# Altium PCB HGCD.PcbDoc
Units mm, origin at the board's own origin, x right, y up, seen from the top; angles counter-clockwise.
Board outline 57.28 x 50.29 mm, 4 copper layers (Top layer, Ground Plane, Power Plane, Bottom layer), stack 0.844 mm thick; 85 components, 62 nets, 353 pads, 88 vias.
Unrouted connection lines stored in the file: 18.
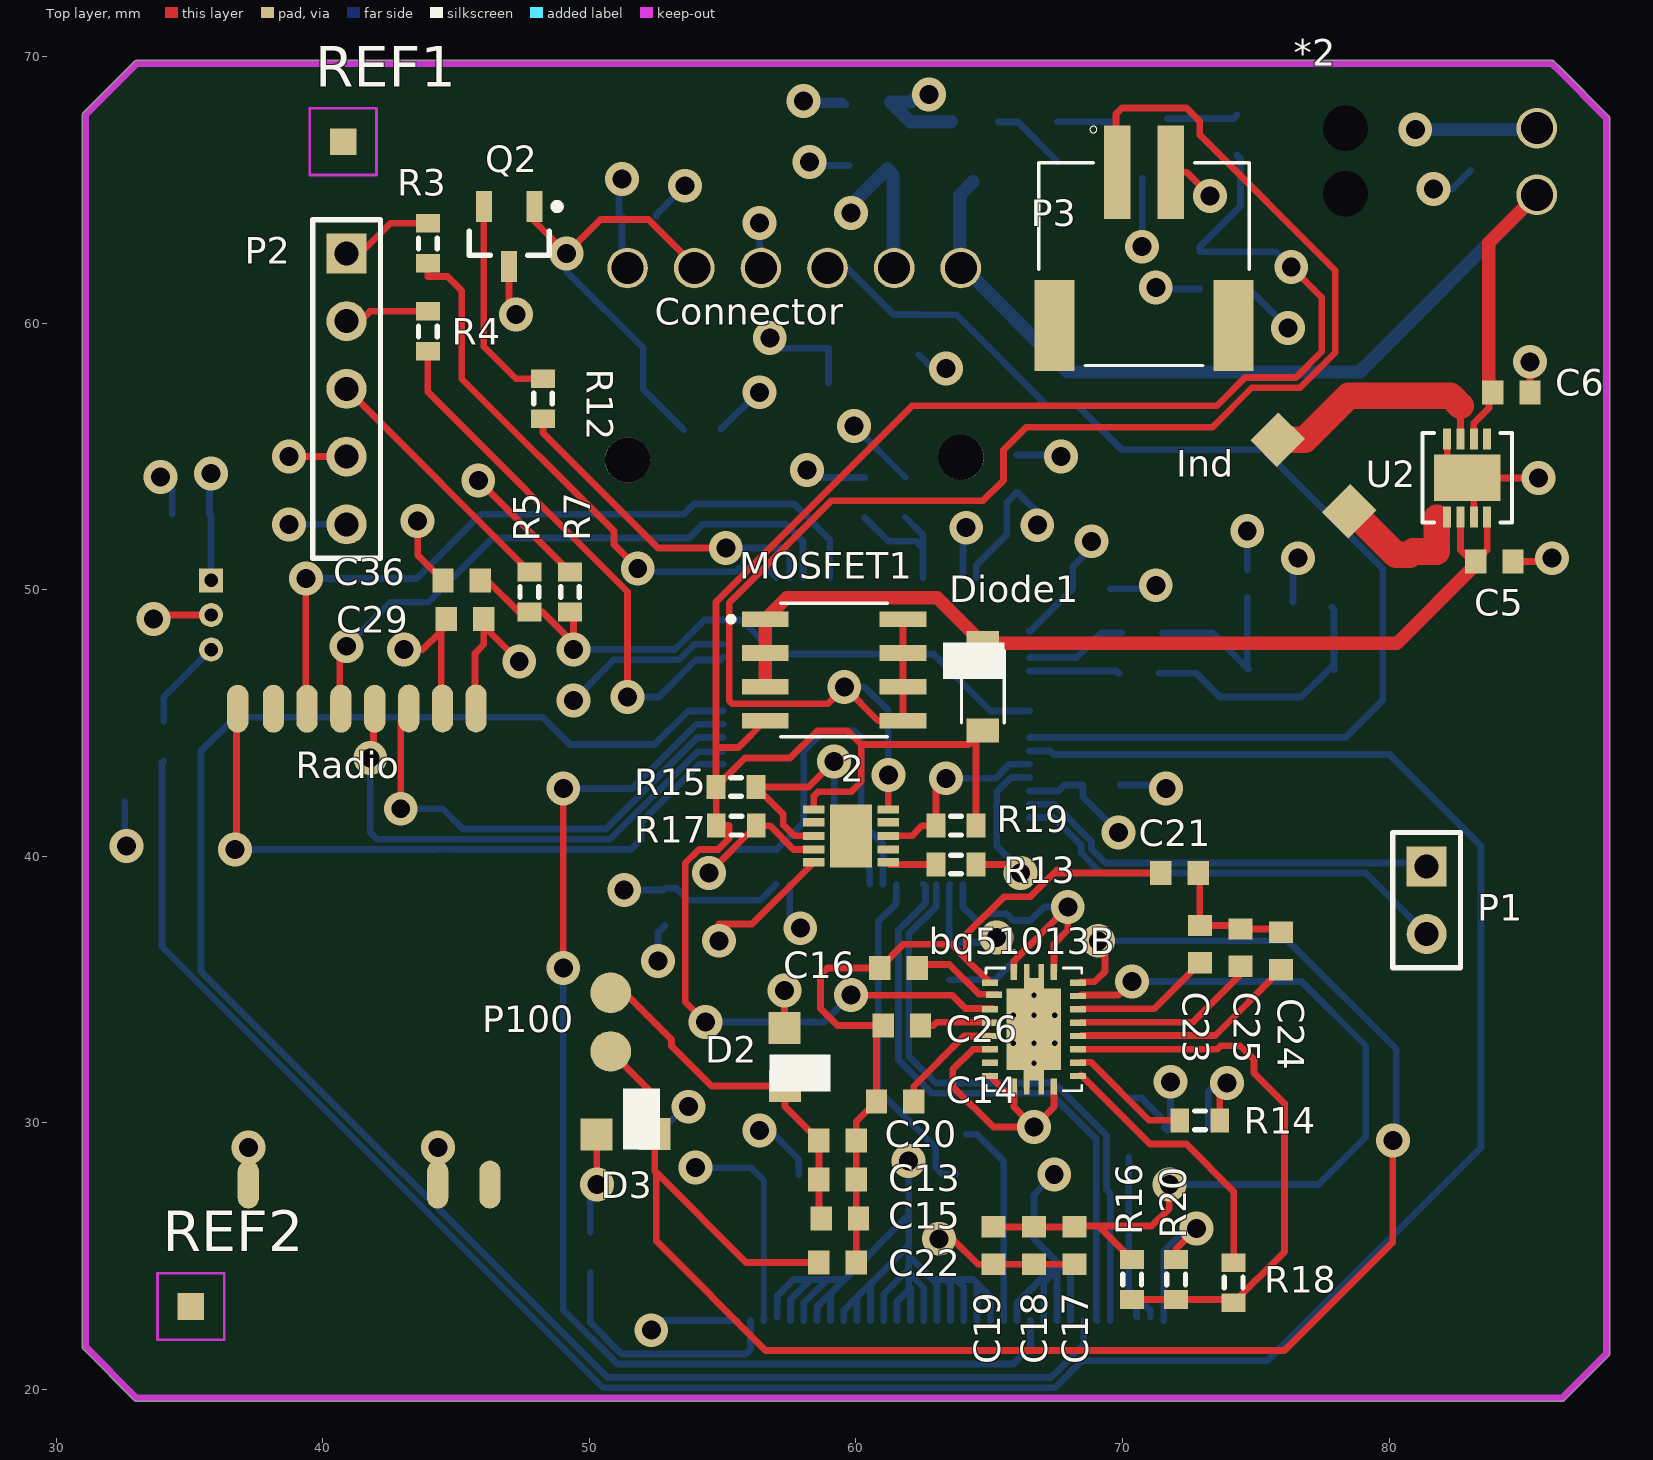
[diagram p0: Top layer view]
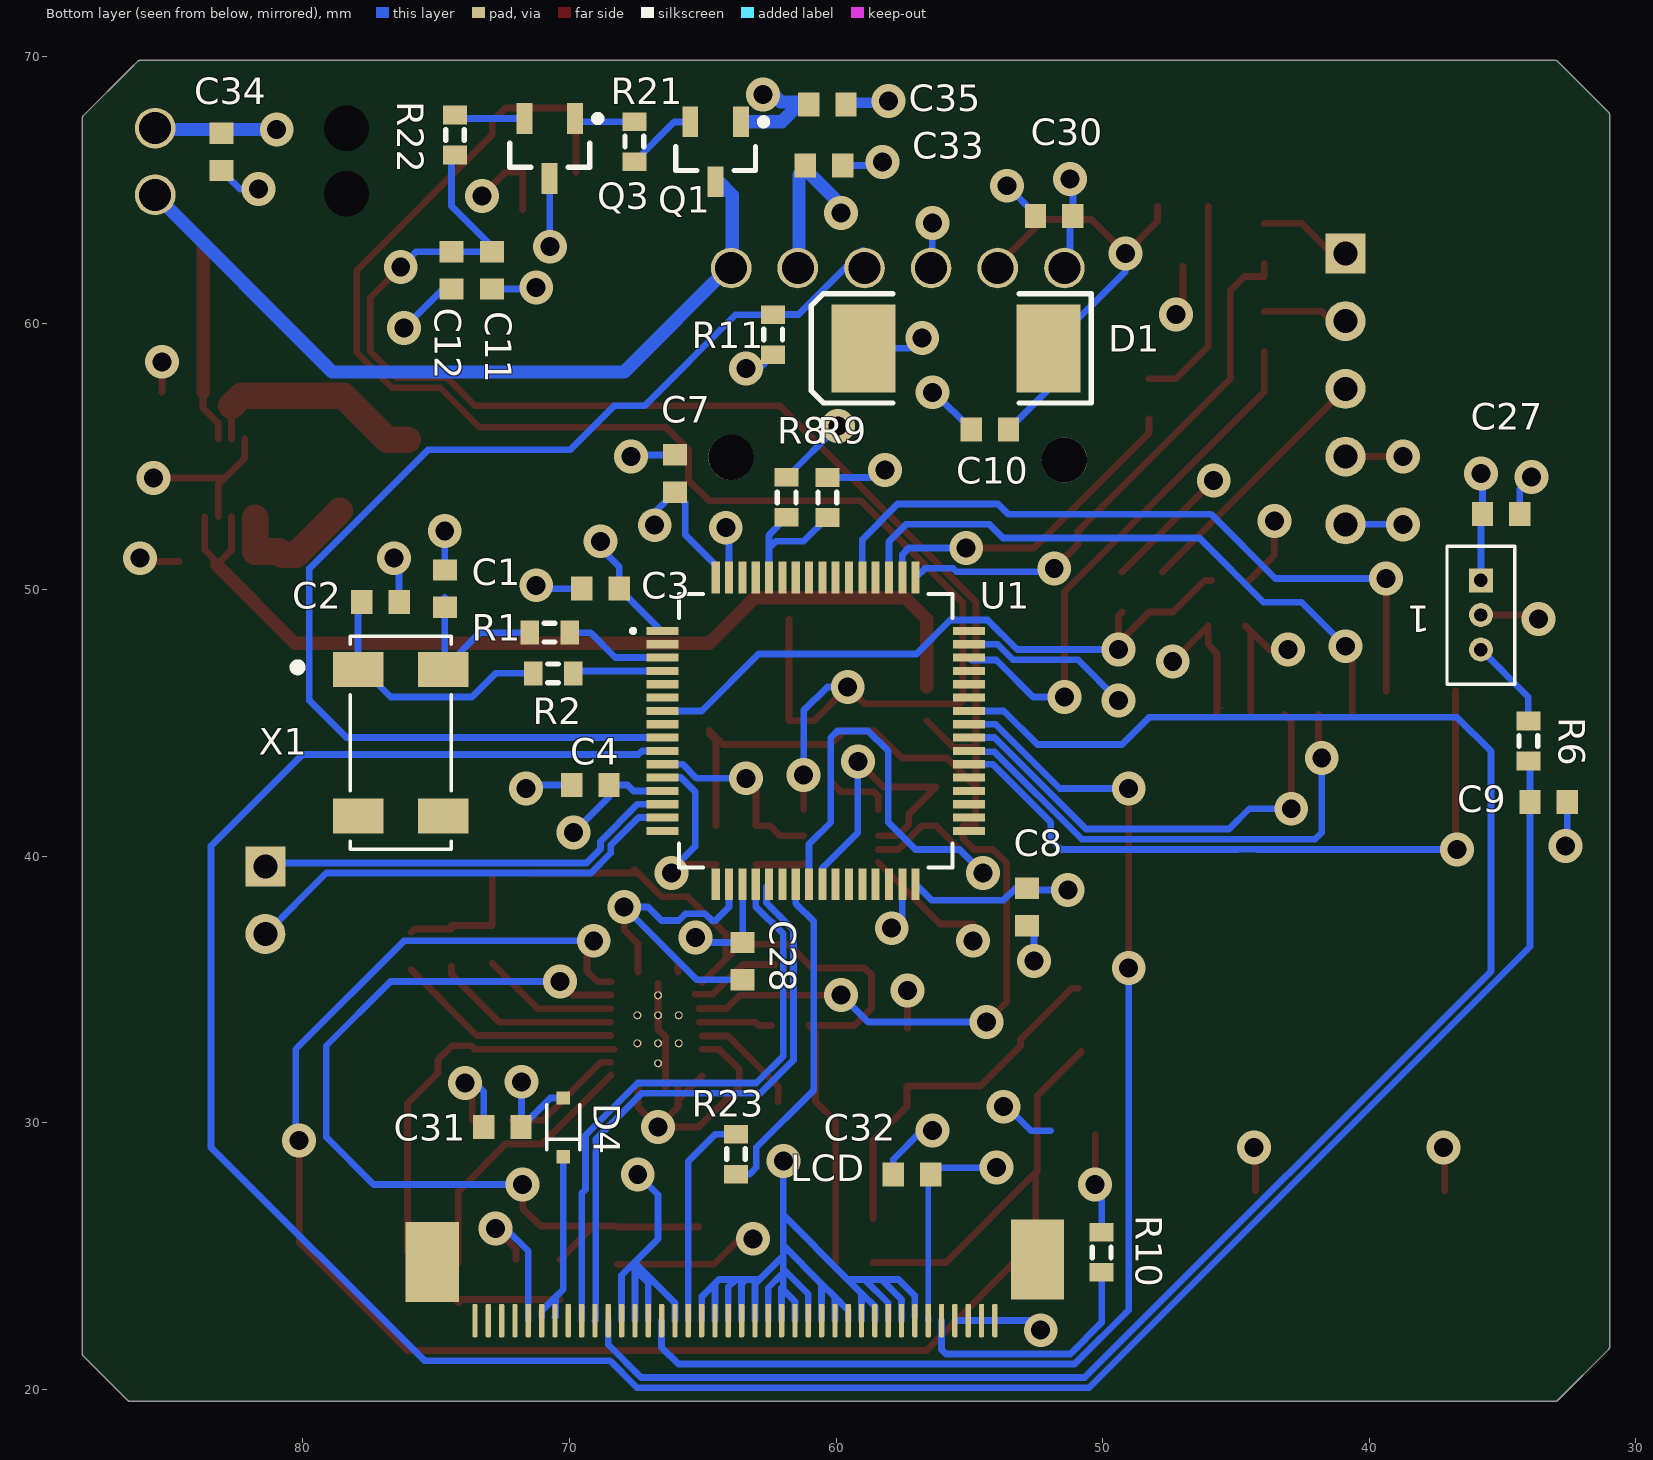
[diagram p1: Bottom layer view, seen from below]
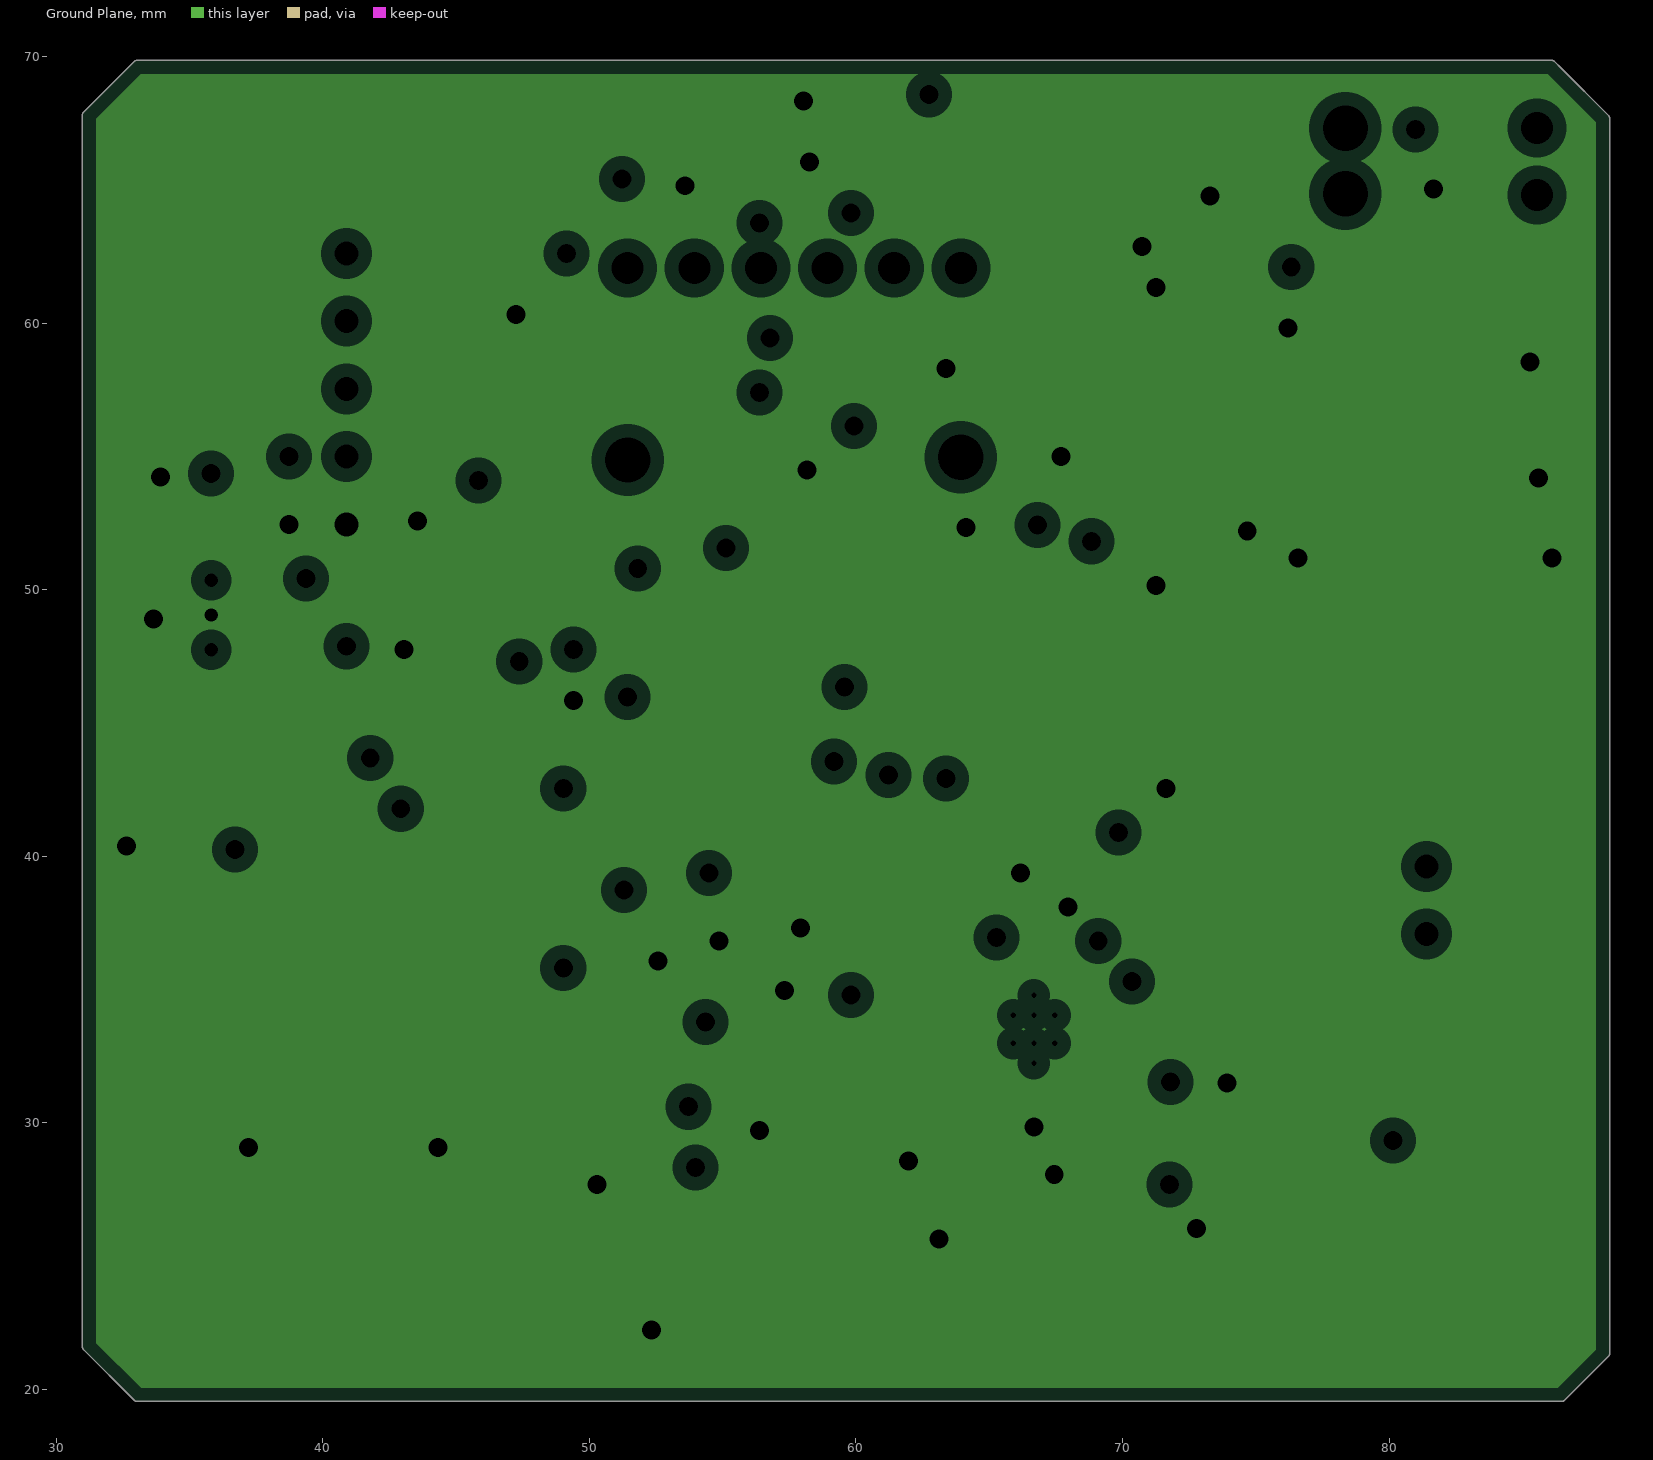
[diagram p2: Ground Plane, clearances drawn from the general rule]
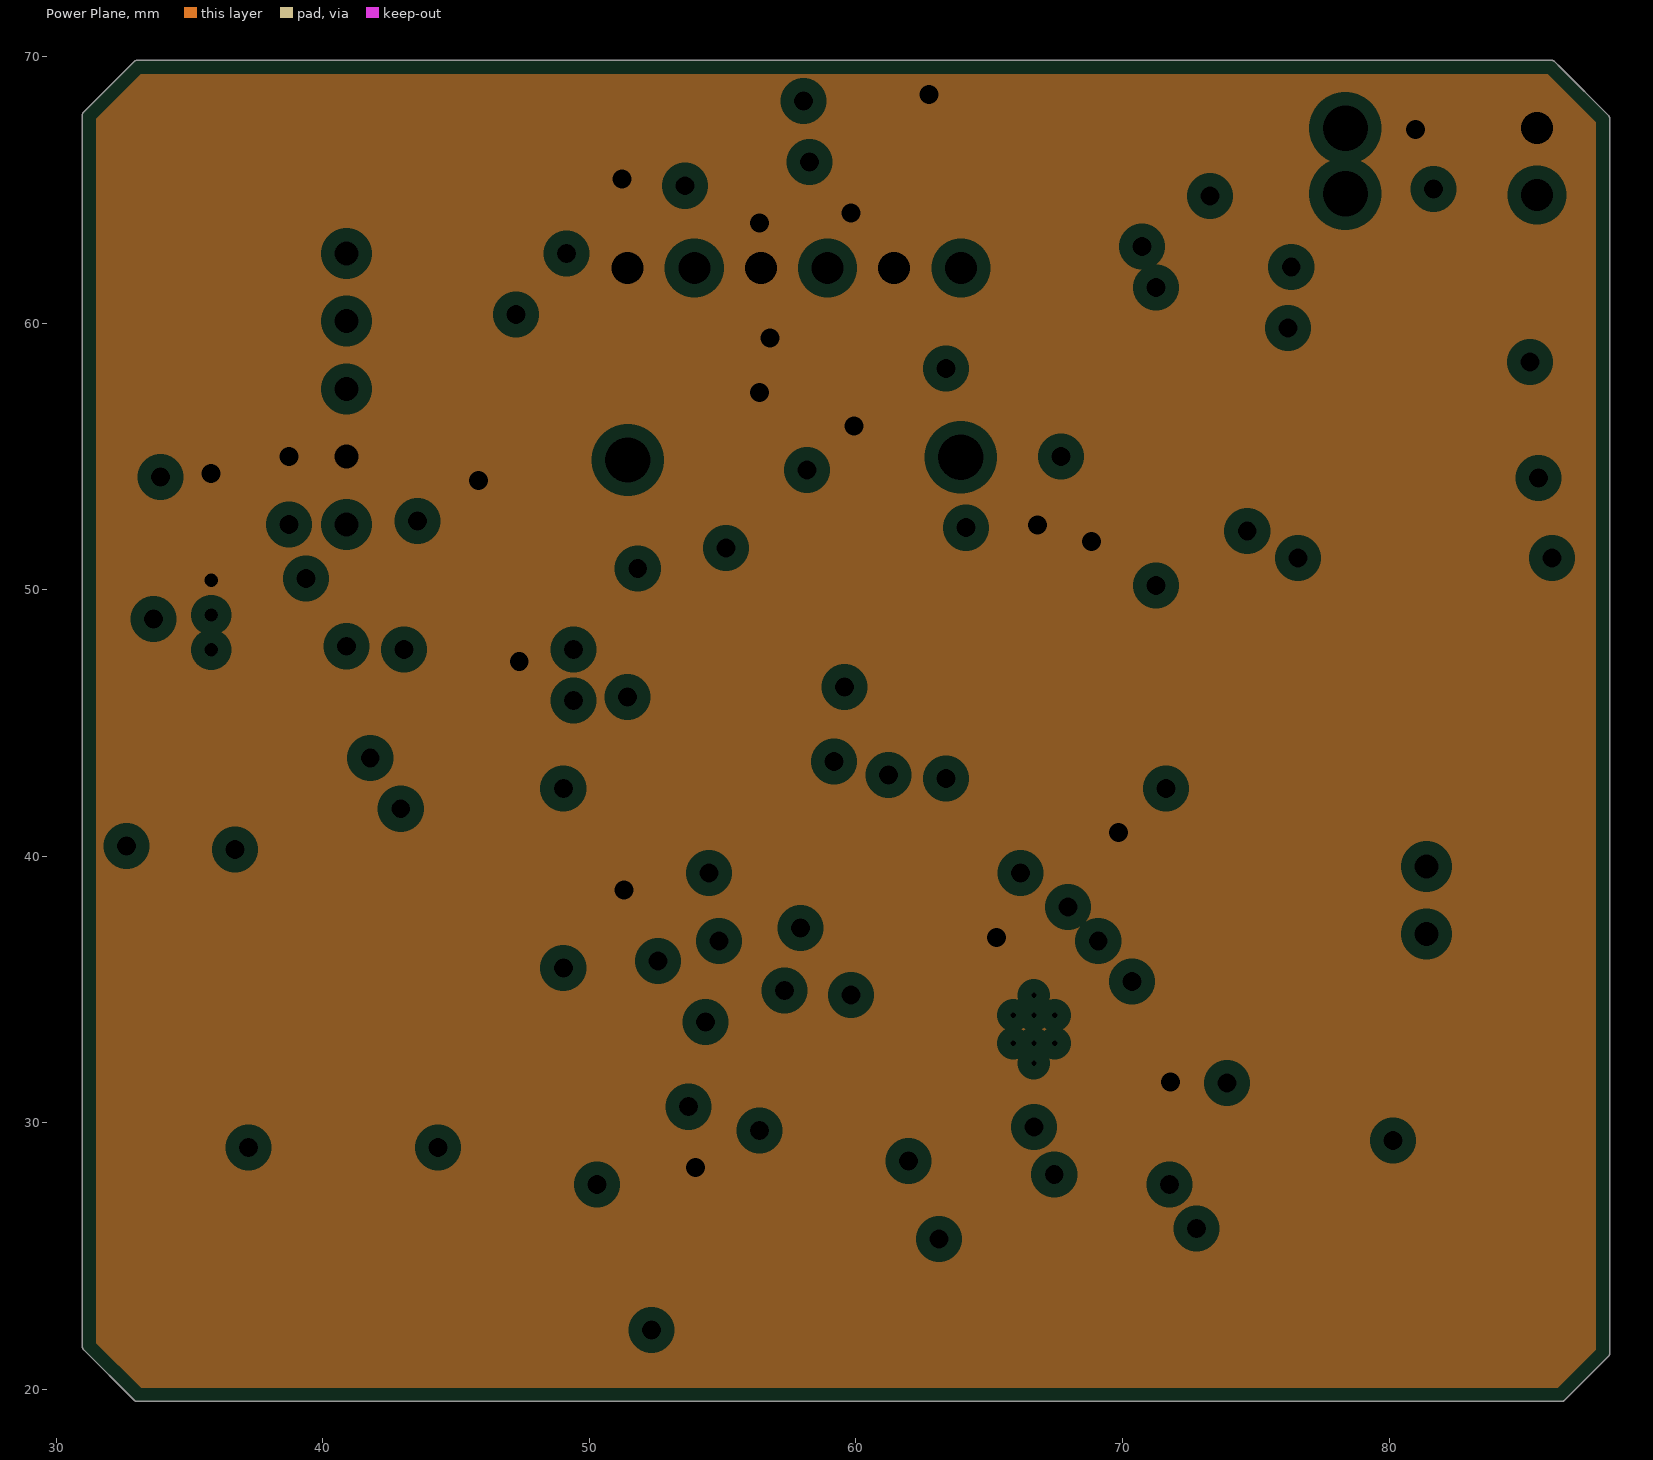
[diagram p3: Power Plane, clearances drawn from the general rule]

## Layer stack, top to bottom
Top Solder: solder mask 0.0102, Solder Resist, Dk 3.5
Top layer: signal copper 0.0356
Dielectric 1: core 0.32, FR-4, Dk 4.8
Ground Plane: plane copper 0.036, net GND
Dielectric 3: prepreg 0.127, Dk 4.2
Power Plane: plane copper 0.036, net VCC
Dielectric 4: core 0.254, Dk 4.2
Bottom layer: signal copper 0.0356
Bottom Solder: solder mask 0.0102, Solder Resist, Dk 3.5

## Board outline
31.025,21.499 cw(c31.115,21.59) 30.988,21.59 30.988,67.818 cw(c31.115,67.818) 31.025,67.909 31.025,67.908 32.93,69.813 32.929,69.813 cw(c33.02,69.723) 33.02,69.85 86.106,69.85 cw(c86.106,69.723) 86.197,69.813 86.196,69.813 86.451,69.559 ccw(c86.36,69.469) 86.45,69.559 ccw(c86.36,69.469) 86.45,69.56 86.451,69.559 88.228,67.781 88.228,67.782 cw(c88.138,67.691) 88.265,67.691 88.265,21.336 cw(c88.138,21.336) 88.228,21.245 88.228,21.246 86.577,19.595 86.578,19.595 cw(c86.487,19.685) 86.487,19.558 33.02,19.558 cw(c33.02,19.685) 32.929,19.595 32.93,19.595

## Design rules (kind name [scope] priority, off if disabled: settings)
Clearance [All] p1: gap=0.127 ignorepadtopadclearanceinfootprint=FALSE
PlaneClearance [All] p1: clearance=0.508
PlaneConnect [All] p1: planeconnectstyle=Relief reliefexpansion=0.508 reliefentries=4 reliefconductorwidth=0.254 reliefairgap=0.254
PolygonConnect [All] p1: connectstyle=Relief reliefconductorwidth=0.254 reliefentries=4 polygonreliefangle="90 Angle" airgapwidth=0.254
RoomDefinition ZigBee [InComponentClass('ZigBee')] p1: confinementstyle=ConfineIn formatcopy=TRUE lockcomponents=FALSE outline -25.4,-25.4 25.4,-25.4 25.4,0 -25.4,0
RoomDefinition WCcircuit [InComponentClass('WCcircuit')] p2: confinementstyle=ConfineIn formatcopy=TRUE lockcomponents=FALSE outline -25.4,-25.4 25.4,-25.4 25.4,0 -25.4,0
RoomDefinition TPS6120x [InComponentClass('TPS6120x')] p3: confinementstyle=ConfineIn formatcopy=TRUE lockcomponents=FALSE outline -25.4,-25.4 25.4,-25.4 25.4,0 -25.4,0
RoomDefinition "TFT LCD ER-TFT018-2" [InComponentClass('TFT LCD ER-TFT018-2')] p4: confinementstyle=ConfineIn formatcopy=TRUE lockcomponents=FALSE outline -25.4,-25.4 25.4,-25.4 25.4,0 -25.4,0
RoomDefinition STM32 [InComponentClass('STM32')] p5: confinementstyle=ConfineIn formatcopy=TRUE lockcomponents=FALSE outline -25.4,-25.4 25.4,-25.4 25.4,0 -25.4,0
RoomDefinition Magnetometer [InComponentClass('Magnetometer')] p6: confinementstyle=ConfineIn formatcopy=TRUE lockcomponents=FALSE outline -25.4,-25.4 25.4,-25.4 25.4,0 -25.4,0
RoomDefinition connectors [InComponentClass('connectors')] p7: confinementstyle=ConfineIn formatcopy=TRUE lockcomponents=FALSE outline -25.4,-25.4 25.4,-25.4 25.4,0 -25.4,0
RoutingVias [All] p1: holewidth=0.711 width=1.27 viastyle="Through Hole" minholewidth=0.711 minwidth=1.27 maxholewidth=0.711 maxwidth=1.27
SolderMaskExpansion [All] p1: expansion=0.102
Width [All] p1: maxlimit=1 minlimit=0.025 preferedwidth=0.254
28 further rules are at their usual default settings.

## Classes and differential pairs
component class ZigBee: C29 Radio
component class WCcircuit: 2 bq51013B C11 C12 C13 C14 C15 C16 C17 C18 C19 C20 C21 C22 C23 C24 C25 C26 D2 D3 Diode1 MOSFET1 P3 P100 R13 R14 R15 R16 R17 R18 R19 R20
component class TPS6120x: C5 C6 C33 C34 C35 Ind Q1 Q3 R21 R22 U2
component class "TFT LCD ER-TFT018-2": C31 C32 D4 LCD R10 R23
component class STM32: C1 C2 C3 C4 C7 C8 C28 C36 P1 P2 R1 R2 R3 R4 R5 R7 R8 R9 R? REF1 REF2 U1 X1
component class Magnetometer: 1 C9 C27 R6
component class connectors: *2 C10 C30 Connector D1 Q2 R11 R12

## Components (designator, comment, footprint, x,y, rotation, side; value= is the part's Value field where it differs from the comment)
1 "magnometer" SIP-3 35.814,50.352 r270 bottom
2 "MCP73837T-FCI/MF" DFN300X300X100-11N 59.817,40.767 r0 top
*2 "Connector button" BUTTON_CONNECTOR 85.539,64.81 r90 top
bq51013B "bq51013B" CONTROLLER_MSP430FR2522IRHLT 66.675,33.511 r0 top
C1 "Cap Semi" 1608[0603] 74.676,50.038 r270 bottom value=4.3p
C2 "Cap Semi" 1608[0603] 77.089,49.53 r0 bottom value=4.3p
C3 "Cap Semi" 1608[0603] 68.834,50.038 r180 bottom value=0.1uF
C4 "Cap Semi" 1608[0603] 69.215,42.672 r180 bottom value=0.1uF
C5 "Cap Semi" 1608[0603] 83.947,51.054 r180 top value=2.2uF
C6 "Cap Semi" 1608[0603] 84.582,57.404 r180 top value=10uF
C7 "Cap Semi" 1608[0603] 66.04,54.356 r270 bottom value=0.1uF
C8 "Cap Semi" 1608[0603] 52.832,38.1 r90 bottom value=0.1uF
C9 "Cap Semi" 1608[0603] 33.274,42.037 r0 bottom value=10uF
C10 "Cap Semi" 1608[0603] 54.229,56.007 r180 bottom value=100pF
C11 "Cap Semi" 1608[0603] 72.898,61.976 r90 bottom value=10uF
C12 "Cap Semi" 1608[0603] 74.422,61.976 r90 bottom value=100nF
C13 "Cap Semi" 1608[0603] 59.309,27.87 r0 top value=68nF
C14 "Cap Semi" 1608[0603] 61.468,30.804 r0 top value=22nF
C15 "Cap Semi" 1608[0603] 59.396,26.416 r0 top value=68nF
C16 "Cap Semi" 1608[0603] 61.595,35.814 r0 top value=10nF
C17 "Cap Semi" 1608[0603] 68.199,25.4 r90 top value=10uF
C18 "Cap Semi" 1608[0603] 66.675,25.4 r90 top value=100nF
C19 "Cap Semi" 1608[0603] 65.151,25.4 r90 top value=10uF
C20 "Cap Semi" 1608[0603] 59.309,29.337 r0 top value=56nF
C21 "Cap Semi" 1608[0603] 72.136,39.37 r180 top value=2.2nF
C22 "Cap Semi" 1608[0603] 59.309,24.765 r0 top value=33pF
C23 "Cap Semi" 1608[0603] 72.898,36.703 r270 top value=10nF
C24 "Cap Semi" 1608[0603] 75.946,36.449 r270 top value=22nF
C25 "Cap Semi" 1608[0603] 74.422,36.576 r270 top value=470nF
C26 "Cap Semi" 1608[0603] 61.722,33.655 r0 top value=470nF
C27 "Cap Semi" 1608[0603] 35.052,52.832 r0 bottom value=0.1uF
C28 "Cap Semi" 1608[0603] 63.5,36.068 r90 bottom value=0.1uF
C29 "Cap Semi" 1608[0603] 45.339,48.895 r180 top value=0.1uF
C30 "Cap Semi" 1608[0603] 51.816,64.008 r180 bottom value=0.1uF
C31 "Cap Semi" 1608[0603] 72.517,29.845 r180 bottom value=0.1uF
C32 "Cap Semi" 1608[0603] 57.15,28.067 r180 bottom value=0.1uF
C33 "Cap Semi" 1608[0603] 60.452,65.913 r0 bottom value=10uF
C34 "Cap Semi" 1608[0603] 83.058,66.421 r90 bottom value=10uF
C35 "Cap Semi" 1608[0603] 60.325,68.199 r0 bottom value=10uF
C36 "Cap Semi" 1608[0603] 45.212,50.349 r0 top value=100nF
Connector "ConnectorWtoB" CONNECTOR_WIRE_TO_PCB 48.935,62.064 r180 top
D1 "Diode" SMC 55.499,59.055 r0 bottom
D2 "DIODE  PTVS12S1UR" PTVS12S1UR 57.258,33.56 r0 top
D3 "DIODE  PTVS12S1UR" PTVS12S1UR 50.277,29.511 r90 top
D4 "PDZ2.7B,115 Zenerdiode" PDZ2.7B,115 70.231,29.833 r270 bottom
Diode1 "Diod MBR0520L-TP" SOD3716X135N 64.758,46.355 r270 top
Ind "MSS4020-103MLB Inductor" MSS4020-103MLB 76.2,55.245 r0 top
LCD "TFT LCD ER-TFT018-2" "LCD TFT DISPLAY" 63.542,24.485 r90 bottom
MOSFET1 "fds9431a" SOIC127P600X175-8N 59.182,46.99 r0 top
P1 "Header 2" HDR1X2 81.407,39.624 r270 top
P2 "Header 5" HDR1X5 40.894,62.611 r270 top
P3 "S2B-PH-K-S(LF)(SN)" JST_S2B-PH-K-S(LF)(SN) 70.403,61.859 r180 top
P100 "WirelessIn" WIRELESSIN 50.8,33.782 r180 top
Q1 "PNP" SOT-23B_N 64.518,66.421 r270 bottom
Q2 "QNPN" SOT-23B_N 46.99,63.246 r270 top
Q3 "QNPN" SOT-23B_N 70.739,66.548 r270 bottom
R1 "Res3" J1-0603 70.739,48.387 r0 bottom value=0R
R2 "Res3" J1-0603 70.612,46.863 r0 bottom value=0R
R3 "22R" J1-0603 43.942,62.992 r270 top value=1K
R4 "22R" J1-0603 43.942,59.69 r270 top value=1K
R5 "22R" J1-0603 47.752,49.911 r270 top value=1K
R6 "Res3" J1-0603 34.036,44.323 r270 bottom value=1K
R7 "Res3" J1-0603 49.276,49.911 r90 top value=100k
R8 "Res3" J1-0603 61.849,53.467 r270 bottom value=1K
R9 "Res3" J1-0603 60.325,53.455 r270 bottom value=1K
R10 "Res3" J1-0603 50.038,25.146 r270 bottom value=1K
R11 "Res3" J1-0603 62.357,59.563 r270 bottom value=1K
R12 "Res3" J1-0603 48.26,57.162 r90 top value=1K
R13 "Res3" J1-0603 63.754,39.694 r0 top value=3.3k
R14 "Res3" J1-0603 72.898,30.099 r0 top value=10k
R15 "Res3" J1-0603 55.499,42.602 r0 top value=1K
R16 "Res3" J1-0603 70.358,24.125 r90 top value=20k
R17 "Res3" J1-0603 55.511,41.148 r0 top value=1K
R18 "Res3" J1-0603 74.168,24.01 r270 top value=75R
R19 "Res3" J1-0603 63.754,41.148 r180 top value=1K
R20 "Res3" J1-0603 72.009,24.125 r270 top value=196R
R21 "Res3" J1-0603 67.564,66.802 r270 bottom value=10k
R22 "Res3" J1-0603 74.295,67.056 r90 bottom value=10k
R23 "Res3" J1-0603 63.754,28.829 r90 bottom value=1k
Radio "RF2401F20" RF2401F20 43.351,43.146 r270 top
REF1 "Fudical sq." FIDUCIAL_SQ1mm_SQ5 40.767,66.802 r90 top
REF2 "Fudical sq." FIDUCIAL_SQ1mm_SQ5 35.052,23.114 r90 top
U1 "STM32L476RX" LQFP64-10x10mm 60.763,44.704 r180 bottom value=Value
U2 "LTC3531EDD-3" LTC3531EDD-3 82.915,54.211 r90 top
X1 "ABS25-32-768KHZ-T" XTAL_ABS25-32-768KHZ-T 76.327,44.259 r180 bottom

## Footprints (in the part's own frame and the unit in brackets; to place one, negate y for a bottom-side part, rotate by r counter-clockwise, add the part's x,y. Pads: shape width x height; smd on the part's side, far side on the other; paste and mask are expansions set on the pad)
1608[0603] [mm] "Chip Capacitor, Body 1.6x0.8mm, IPC High Density"
  rect 0.8x0.9 smd: 1(-0.7,0) 2(0.7,0)
  body extent -0.87,-0.48 0.87,0.48, height 1.3
BUTTON_CONNECTOR [mm]
  round 1.524 hole 1.2: 1(0,0) 2(2.5,0)
  round 1.524 hole 1.7: 25(0.04,7.18) 25(2.5,7.18)
CONNECTOR_WIRE_TO_PCB [mm]
  round 1.524 hole 1.2: 1(-15,0) 2(-12.5,0) 3(-10,0) 4(-7.5,0) 5(-5,0) 6(-2.5,0)
  round 1.7 hole 1.7: hole1(-15,7.1) hole2(-2.5,7.2)
  Top layer lines w0.254: -15,0 -15,0
CONTROLLER_MSP430FR2522IRHLT [mm]
  rect 0.24x0.6 smd: 1(-0.75,2.15) 10(-0.75,-2.15) 11(0.75,-2.15) 20(0.75,2.15)
  rect 0.6x0.24 smd: 2(-1.65,1.75) 3(-1.5,1.3) 4(-1.65,0.75) 5(-1.65,0.25) 6(-1.65,-0.25) 7(-1.65,-0.75) 8(-1.65,-1.25) 9(-1.65,-1.75) 12(1.65,-1.75) 13(1.65,-1.25) 14(1.65,-0.75) 15(1.65,-0.25) 16(1.65,0.25) 17(1.65,0.75) 18(1.65,1.25) 19(1.65,1.75)
  round 0.3 hole 0.2: 21(-0.775,-0.525) 21(-0.775,0.525) 21(0,-1.275) 21(0,-0.525) 21(0,0.525) 21(0,1.275) 21(0.775,-0.525) 21(0.775,0.525)
  rect 0.2x0.525 smd: 21(-0.275,-2.187) 21(-0.275,2.187) 21(0.275,-2.187) 21(0.275,2.187)
  rect 0.75x0.4 smd: 21(0,-1.725) 21(0,1.725)
  rect 2.05x3.05 smd: 21(0,0)
  silkscreen extent -1.8,-2.3 1.8,2.95
DFN300X300X100-11N [mil]
  rect 32x12 smd: 1(-55,39) 2(-55,20) 3(-55,0) 4(-55,-20) 5(-55,-39) 6(55,-39) 7(55,-20) 8(55,0) 9(55,20) 10(55,39)
  rect 62x93 smd: 11(0,0)
FIDUCIAL_SQ1mm_SQ5 [mm]
  rect 1x1 smd paste-0.5 mask+0.75: 0(0,0)
  Top layer keep-out lines w0.1: -1.25,1.25 -1.25,-1.25 1.25,-1.25 1.25,1.25 -1.25,1.25
HDR1X2 [mm] "Connector; Header; 2 Position"
  rect 1.5x1.5 hole 0.9: 1(0,0)
  round 1.5 hole 0.9: 2(2.54,0)
  silkscreen extent -1.27,-1.27 3.81,1.27
HDR1X5 [mm] "Connector; Header; 5 Position"
  rect 1.5x1.5 hole 0.9: 1(0,0)
  round 1.5 hole 0.9: 2(2.54,0) 3(5.08,0) 4(7.62,0) 5(10.16,0)
  silkscreen extent -1.27,-1.27 11.43,1.27
J1-0603 [mm] "Chip Resistor, Body 1.6x0.8mm, IPC High Density"
  rect 0.7x0.9 smd: 1(-0.75,0) 2(0.75,0)
  silkscreen extent -0.2,-0.35 0.2,0.35, body extent -0.85,-0.48 0.85,0.48, height 0.9
JST_S2B-PH-K-S(LF)(SN) [mm]
  rect 1x3.5 smd: 1(0.6,-3.8) 2(-1.4,-3.8)
  rect 1.5x3.4 smd: P1(2.95,1.95) P2(-3.75,1.95)
  silkscreen extent -4.35,-5.53 3.55,3.45
"LCD TFT DISPLAY" [mm]
  rrect50% 1.25x0.2 smd: 1(-1.9,10) 2(-1.9,9.5) 3(-1.9,9) 4(-1.9,8.5) 5(-1.9,8) 6(-1.9,7.5) 7(-1.9,7) 8(-1.9,6.5) 9(-1.9,6) 10(-1.9,5.5) 11(-1.9,5) 12(-1.9,4.5) 13(-1.9,4) 14(-1.9,3.5) 15(-1.9,3) 16(-1.9,2.5) 17(-1.9,2) 18(-1.9,1.5) 19(-1.9,1) 20(-1.9,0.5) 21(-1.9,0) 22(-1.9,-0.5) 23(-1.9,-1) 24(-1.9,-1.5) 25(-1.9,-2) 26(-1.9,-2.5) 27(-1.9,-3) 28(-1.9,-3.5) 29(-1.9,-4) 30(-1.9,-4.5) 31(-1.9,-5) 32(-1.9,-5.5) 33(-1.9,-6) 34(-1.9,-6.5) 35(-1.9,-7) 36(-1.9,-7.5) 37(-1.9,-8) 38(-1.9,-8.5) 39(-1.9,-9) 40(-1.9,-9.5)
  rect 3x2 smd: SMD1(0.3,11.6) SMD2(0.4,-11.1)
LQFP64-10x10mm [mm]
  rect 1.194x0.305 smd: 1(-5.75,3.75) 2(-5.75,3.25) 3(-5.75,2.75) 4(-5.75,2.25) 5(-5.75,1.75) 6(-5.75,1.25) 7(-5.75,0.75) 8(-5.75,0.25) 9(-5.75,-0.25) 10(-5.75,-0.75) 11(-5.75,-1.25) 12(-5.75,-1.75) 13(-5.75,-2.25) 14(-5.75,-2.75) 15(-5.75,-3.25) 16(-5.75,-3.75) 33(5.75,-3.75) 34(5.75,-3.25) 35(5.75,-2.75) 36(5.75,-2.25) 37(5.75,-1.75) 38(5.75,-1.25) 39(5.75,-0.75) 40(5.75,-0.25) 41(5.75,0.25) 42(5.75,0.75) 43(5.75,1.25) 44(5.75,1.75) 45(5.75,2.25) 46(5.75,2.75) 47(5.75,3.25) 48(5.75,3.75)
  rect 0.305x1.194 smd: 17(-3.75,-5.75) 18(-3.25,-5.75) 19(-2.75,-5.75) 20(-2.25,-5.75) 21(-1.75,-5.75) 22(-1.25,-5.75) 23(-0.75,-5.75) 24(-0.25,-5.75) 25(0.25,-5.75) 26(0.75,-5.75) 27(1.25,-5.75) 28(1.75,-5.75) 29(2.25,-5.75) 30(2.75,-5.75) 31(3.25,-5.75) 32(3.75,-5.75) 49(3.75,5.75) 50(3.25,5.75) 51(2.75,5.75) 52(2.25,5.75) 53(1.75,5.75) 54(1.25,5.75) 55(0.75,5.75) 56(0.25,5.75) 57(-0.25,5.75) 58(-0.75,5.75) 59(-1.25,5.75) 60(-1.75,5.75) 61(-2.25,5.75) 62(-2.75,5.75) 63(-3.25,5.75) 64(-3.75,5.75)
  silkscreen extent -6.93,-5.13 5.13,5.13, body extent 0,0 0.25,0.25, height 0.25
LTC3531EDD-3 [mil]
  rect 31x12 smd: 1(-58.17,29.13) 2(-58.17,9.45) 3(-58.17,-10.24) 4(-58.17,-29.92) 5(56.83,-29.92) 6(56.83,-10.24) 7(56.83,9.45) 8(56.83,29.13)
  rect 69x98 smd: 9(-0.67,-0.39)
  silkscreen extent -67,-66 65,66
MSS4020-103MLB [mm]
  rect 1.5x1.4 smd rot 45: 1(2.3,-2.3) 2(-0.387,0.387)
PDZ2.7B,115 [mm]
  rect 0.5x0.5 smd: 1(1.1,0) 2(-1.1,0)
  silkscreen extent -0.85,-0.63 0.85,0.63
PTVS12S1UR [mm]
  rect 1.2x1.2 smd: A(0.06,0) C(0.08,-2.174)
  Top layer lines w0.025: 0,-2.17 0.08,-2.174 ; 0.03,0 0.06,0
  silkscreen extent -0.5,-2.36 1.78,-1
RF2401F20 [mm]
  oval 1.8x0.8 smd: 1(-2.4,2.4) 2(-2.4,1.14) 3(-2.4,-0.12) 4(-2.39,-1.4) 5(-2.39,-2.67) 6(-2.39,-3.94) 7(-2.39,-5.2) 8(-2.39,-6.54) 9(15.46,2.92) 10(15.46,0.96) 11(15.46,-6.14)
  Top layer region: -5.1,4.9
  Top layer lines w0.025: -2.4,2.09 -2.4,2.163 ; -2.4,2.48 -2.4,2.4 ; -2.4,2.163 -2.4,2.4 ; -2.4,2.163 -2.4,2.4
SIP-3 [mm]
  rect 0.9x0.9 hole 0.5: 1(0,0)
  round 0.9 hole 0.5: 2(1.3,0) 3(2.6,0)
  silkscreen extent -1.27,-1.27 3.9,1.27
SMC [mm] "DO-214-AB/SMC; 2 C-Bend Leads; Body 7.9 x 5.9 mm, inc. leads (LxW)"
  rect 2.4x3.3 smd: 1(-3.475,0) 2(3.475,0)
  silkscreen extent -5.07,-2.05 5.43,2.05
SOD3716X135N [mm]
  rect 0.91x1.22 smd: A(1.635,0) C(-1.635,0)
  silkscreen extent -1.66,-1.48 1.35,0.8
SOIC127P600X175-8N [mm]
  rect 1.75x0.59 smd: 1(-2.585,1.905) 2(-2.585,0.635) 3(-2.585,-0.635) 4(-2.585,-1.905) 5(2.585,-1.905) 6(2.585,-0.635) 7(2.585,0.635) 8(2.585,1.905)
  silkscreen extent -3.97,-2.5 2,2.5
SOT-23B_N [mm] "SOT23, 3-Leads, Body 2.9x1.3mm, Pitch 0.95mm, Lead Span 2.4mm, IPC Medium Density"
  rect 1.15x0.6 smd: 1(-1.125,0.95) 2(-1.125,-0.95) 3(1.125,0)
  silkscreen extent -1.25,-1.5 0.7,1.92, body extent -0.7,-1.5 0.7,1.5, height 1.14
WIRELESSIN [mil]
  round 60 smd: 1(0,43.31) 2(0,-43.31)
XTAL_ABS25-32-768KHZ-T [mm]
  rect 1.9x1.3 smd: 1(-1.6,2.75) 2(-1.6,-2.75) 3(1.6,-2.75) 4(1.6,2.75)
  silkscreen extent -4.02,-4 1.9,4

## Part data
2: "MCP73837 Series 6 V Linear Battery Charge Controller Surface Mount - DFN-10", Package="DFN-10 Microchip", Availability=Good, MF=Microchip, MP=MCP73837T-FCI/MF, Price="0.98 USD", SnapEDA_Link=https://www.snapeda.com/symbols-footprints/MCP73837T-FCI/MF/Microchip/view-part/?ref=snap
C1 C2 C3 C4 C5 C6 C7 C8 C9 C10 C11 C12 C13 C14 C15 C16 C17 C18 C19 C20 C21 C22 C23 C24 C25 C26 C27 C28 C29 C30 C31 C32 C33 C34 C35 C36: "Capacitor (Semiconductor SIM Model)", LatestRevisionDate=29-May-2009, LatestRevisionNote="IPC-7351 Footprint Added.", PackageDescription="Chip Capacitor", PackageReference=C1206, Published=8-Jun-2000, Publisher="Altium Limited"
D1: "Default Diode", Code_JEDEC=DO-214-AB, LatestRevisionDate=17-Jul-2002, LatestRevisionNote="Re-released for DXP Platform.", PackageDescription="DO-214-AB/SMC; 2 C-Bend Leads; Body 7.9 x 5.9 mm, inc. leads (LxW)", PackageReference=SMC, PackageVersion=Sep-1996, Published=8-Jun-2000, Publisher="Altium Limited"
P1: "Header, 2-Pin", LatestRevisionDate=17-Jul-2002, LatestRevisionNote="Re-released for DXP Platform.", Publisher="Altium Limited"
P2: "Header, 5-Pin", LatestRevisionDate=17-Jul-2002, LatestRevisionNote="Re-released for DXP Platform.", Publisher="Altium Limited"
P3: "Header Side Entry 2way", Package=None, Availability=Good, MF=JST, MP="S2B-PH-K-S (LF)(SN)", Price="0.12 USD", SnapEDA_Link=https://www.snapeda.com/symbols-footprints/S2B-PH-K-S%20%28LF%29%28SN%29/JST/view-part/?ref=snap
Q1: "PNP Bipolar Transistor", LatestRevisionDate=29-May-2009, LatestRevisionNote="IPC-7351 Footprint Added.", PackageDescription="3-Pin SOT-23 Package 0.95 mm Pitch, 2.4 mm Lead Span", PackageReference=SOT-23B, PackageVersion=Aug-1999, Published=8-Jun-2000, Publisher="Altium Limited"
Q2 Q3: "NPN Bipolar Transistor", LatestRevisionDate=29-May-2009, LatestRevisionNote="IPC-7351 Footprint Added.", PackageDescription="3-Pin SOT-23 Package 0.95 mm Pitch, 2.4 mm Lead Span", PackageReference=SOT-23B, PackageVersion=Aug-1999, Published=8-Jun-2000, Publisher="Altium Limited"
R1 R2 R6 R7 R8 R9 R10 R11 R12 R13 R14 R15 R16 R17 R18 R19 R20 R21 R22 R23: "Resistor", LatestRevisionDate=29-May-2009, LatestRevisionNote="IPC-7351 Footprint Added.", PackageDescription="Chip Resistor", PackageReference=J1-0603, Published=8-Jun-2000, Publisher="Altium Limited"
R3 R4 R5: library part Res3, "Resistor", LatestRevisionDate=29-May-2009, LatestRevisionNote="IPC-7351 Footprint Added.", PackageDescription="Chip Resistor", PackageReference=J1-0603, Published=8-Jun-2000, Publisher="Altium Limited"
REF1 REF2: library part Fudicalsquare, "Fiducal square 1mm"
U1: "Imported", Manufacturer_Part_Number=stm32l476rx, Copyright="Copyright (C) 2016 Accelerated Designs. All rights reserved", RefDes=RefDes, Type=Type, Vendor="ST Microelectronics"
U2: "LTC3531 - 200mA Buck-Boost Synchronous DC/DC Converters", Package=None, Availability=Unavailable, MF="Linear Technology", MP=LTC3531EDD-3, Price=None, SnapEDA_Link=https://www.snapeda.com/parts/LTC3531EDD-3/Linear%20Technology/view-part/?ref=snap
X1: Package=None, Availability=Unavailable, MF=Abracon, MP=ABS25-32-768KHZ-T, Price=None, SnapEDA_Link=https://www.snapeda.com/symbols-footprints/ABS25-32-768KHZ-T/Abracon/view-part/?ref=snap

## Via types
v1: diameter 1.27, hole 0.711, Top layer to Bottom layer, 80 vias
v2: diameter 1.27/1.27 (per signal layer), hole 0.711, Top layer to Bottom layer, 8 vias

## Nets (pads, with @x,y where several pads share a name; then routed paths per layer and width w, separated by ;. In a path a pad name is that pad's centre, name@x,y a point inside that pad or via, vN(x,y) a via of type N, cw(c..) or ccw(c..) an arc to the next point about the centre after c; other vN are vias at no path point)
"CS LCD": LCD.9 U1.20 | length 22.5
  Bottom layer w0.254: U1.20 63.013,38.121 61.976,37.084 61.976,32.512 62.992,31.496 67.437,31.496 69.396,29.537 69.396,27.505 69.542,27.359 LCD.9
GND: 1.2 2.5 bq51013B.1 bq51013B.7 bq51013B.9 bq51013B.10 bq51013B.11 bq51013B.20 C1.1 C2.1 C3.1 C4.1 C5.1 C6.1 C7.1 C8.1 C9.1 C11.1 C12.1 C17.1 C18.1 C19.1 C27.1 C28.1 C29.2 C30.1 C31.1 C32.1 C33.1 C34.1 C35.1 C36.1 D2.A D3.A LCD.5 LCD.12 LCD.13 LCD.14 LCD.16 LCD.18 LCD.19 LCD.20 LCD.21 LCD.22 LCD.23 LCD.24 LCD.25 LCD.26 LCD.27 LCD.28 LCD.29 LCD.30 LCD.31 LCD.32 LCD.33 LCD.34 LCD.37 LCD.38 LCD.39 LCD.40 P2.5 P3.2 Q2.3 Q3.3 R9.1 R10.1 R11.2 R13.2 R14.2 R20.1 Radio.2 Radio.10 Radio.11 U1.12 U1.18 U1.31 U1.47 U1.63 U2.3 U2.8 U2.9 | length 195.3
  Top layer w0.254: v1(33.655,48.895) 33.812,49.052 1.2 ; Radio.11@37.167,27.466 37.167,29.039 v1(37.211,29.083) ; v1(43.053,47.752) 43.75,47.752 C29.2@44.447,48.449 ; v1(43.561,52.578) 43.561,51.3 C36.1 ; Radio.10@44.267,27.466 44.267,29.027 v1(44.323,29.083) ; Radio.2@44.447,45.326 C29.2@44.447,48.449 ; C29.2@44.639,48.641 C29.2@44.447,48.449 ; Q2.3 46.99,60.706 47.244,60.452 v1(47.244,60.325) ; D3.A 50.277,29.541 50.277,27.701 v2(50.292,27.686) ; v1(54.864,36.83) 54.864,37.465 56.109,37.465 2.5 ; D2.A v1(57.318,34.966) ; v1(63.119,25.654) 63.627,25.654 64.581,24.7 C19.1 C18.1 C17.1 ; R13.2 65.843,39.694 v1(66.167,39.37) ; bq51013B.9 65.925,30.861 ; bq51013B.7 64.384,32.761 63.627,32.004 63.627,31.369 65.151,29.845 v2(66.675,29.845) ; bq51013B.10 65.925,30.861 ; bq51013B.1 65.925,36.08 v1(67.945,38.1) 67.945,37.235 67.425,36.715 bq51013B.20 ; bq51013B.11 67.425,30.595 v2(66.675,29.845) ; P3.2@71.755,64.262 71.755,65.659 72.39,65.659 v1(73.279,64.77) ; R20.1 72.009,25.273 v1(72.771,26.035) v1@72.39,26.035 ; R14.2 73.648,31.611 73.763,31.496 v2(73.914,31.496) ; U2.8 82.175,54.944 U2.9 ; U2.3 83.175,53.944 U2.9 ; C5.1 86.36,51.054 86.233,51.181 v1(86.106,51.181) ; C6.1 v1(85.282,58.547) ; v1(85.598,54.194) U2.9 ; 65.925,30.861 65.925,30.595 v2(66.675,29.845)
  Bottom layer w0.254: C9.1 32.574,40.448 v1(32.639,40.383) ; v1@33.495,54.229 v1(33.909,54.229) 34.352,53.786 C27.1 ; 1.2@35.577,48.815 1.2 ; v1(38.735,52.451) P2.5 ; v1(49.403,45.847) 50.927,47.371 53.361,47.371 53.944,47.954 U1.47 ; R10.1 50.038,27.432 v2(50.292,27.686) ; v1(52.324,22.225) 52.684,22.585 LCD.40 LCD.39 LCD.38 LCD.37 ; C30.1 52.516,64.073 v2(53.594,65.151) ; v1(52.578,36.068) 52.578,37.146 C8.1 ; v1(56.388,29.718) 56.769,29.718 57.85,28.637 C32.1 ; LCD.34@57.05,22.712 57.05,23.522 57.658,24.13 58.293,24.13 ; v1(57.318,34.966) v1@57.318,35.22 ; U1.31 57.513,37.701 v1(57.912,37.303) ; LCD.33 57.542,23.379 58.293,24.13 ; LCD.32 58.042,23.244 58.928,24.13 ; v1(58.166,54.483) 58.444,54.205 R9.1 ; v1@58.467,66.04 v1(58.253,66.04) 58.38,65.913 C33.1 ; LCD.31 58.542,23.109 59.042,23.609 ; LCD.30 59.042,23.609 ; LCD.29 59.542,22.966 60.042,23.466 ; LCD.28 60.042,23.466 ; LCD.27 60.542,23.966 ; LCD.26 61.042,23.577 61.976,24.511 ; LCD.25 61.542,23.294 61.976,23.728 61.976,24.511 ; v2(61.976,28.575) 61.976,26.543 ; 62.039,24.32 62.542,23.818 LCD.23 ; LCD.24 62.042,23.81 ; R11.2 62.877,58.293 v1(63.373,58.293) ; LCD.22 63.042,23.953 62.865,24.13 ; C28.1 65.213,35.368 v1(67.945,38.1) ; LCD.21 63.542,23.961 63.373,24.13 ; U1.18 64.013,38.095 64.516,37.592 64.656,37.592 64.91,37.846 65.646,37.846 65.9,37.592 66.548,37.592 67.056,38.1 v1@67.724,38.1 ; U1.63 64.013,52.202 v1(64.135,52.324) ; LCD.20 64.042,23.842 63.754,24.13 ; LCD.19 64.542,23.977 ; LCD.18@65.034,22.585 65.034,23.485 64.542,23.977 ; C7.1 67.626,55.056 v1(67.691,54.991) ; LCD.16 66.042,23.243 67.564,24.765 ; v1(66.167,39.37) 66.167,39.497 65.278,40.386 65.278,42.418 65.814,42.954 U1.12 ; LCD.14 67.042,23.989 67.542,24.489 ; v1(67.437,28.067) 66.675,27.305 66.675,25.654 67.564,24.765 ; LCD.13 67.542,24.489 ; LCD.12 68.042,24.287 67.564,24.765 ; C3.1 71.12,50.038 v1(71.247,50.165) ; C4.1 71.501,42.672 v1(71.628,42.545) ; v2(70.73,62.865) 70.739,62.874 Q3.3 ; v1(71.247,61.341) 71.312,61.276 C11.1 ; LCD.5 71.542,25.187 72.39,26.035 v1(72.771,26.035) ; C31.1 73.217,31.18 73.533,31.496 v2(73.914,31.496) ; C12.1 74.741,61.276 v1(76.2,59.817) v1@75.993,59.61 ; C1.1 74.676,52.404 v1(74.676,52.197) ; C2.1 76.389,50.989 v1(76.581,51.181) v1@76.835,51.181 ; v1(81.661,65.024) 82.361,65.024 C34.1 ; 58.293,24.13 58.928,24.13 ; 58.928,24.13 59.563,24.13 ; 59.042,23.609 59.563,24.13 ; 59.563,24.13 61.976,26.543 ; 60.042,23.466 60.542,23.966 ; 60.542,23.966 61.976,25.4 ; 61.976,24.511 61.976,24.956 ; 61.976,24.956 61.976,25.4 ; 61.976,24.956 62.039,24.956 62.865,24.13 ; 61.976,25.4 61.976,26.543 ; 62.865,24.13 63.373,24.13 ; 63.373,24.13 63.754,24.13 ; 63.754,24.13 64.389,24.13 64.542,23.977 ; 67.542,24.489 67.564,24.511 67.564,24.765 ; v1(58.039,68.326) 59.498,68.326 C35.1 58.166,68.199 v1(58.039,68.326)
"MOSI LCD": R23.1 U1.23 | length 12.7
  Bottom layer w0.254: U1.23 61.513,38.238 60.833,37.557 60.833,31.242 62.992,29.083 62.992,28.321 63.234,28.079 R23.1
Net1_3: 1.3 R6.1 | length 3.4
  Bottom layer w0.254: R6.1 34.036,45.974 1.3
Net2_1: 2.1 bq51013B.4 C11.2 C12.2 Diode1.A MOSFET1.4 R15.1 R17.1 R19.1 R22.1 | length 88.5
  Top layer w0.254: v1(54.356,33.782) 53.594,34.544 53.594,39.738 54.115,40.259 54.833,40.259 55.238,40.664 55.238,41.16 R17.1@54.761,41.16 ; R17.1 R17.1@54.761,41.16 ; MOSFET1.4 55.593,44.081 54.749,44.081 ; 2.1 58.42,42.26 58.578,42.418 59.817,42.418 60.198,42.799 60.198,44.196 ; v1(59.817,34.798) 59.824,34.791 63.6,34.791 64.101,34.29 65.14,34.29 bq51013B.4@65.152,34.278 ; R19.1 64.504,44.351 64.742,44.589 64.758,44.589 Diode1.A 64.234,44.196 60.198,44.196 ; v1(76.327,62.103) 77.47,60.96 77.47,58.928 76.497,57.955 74.592,57.955 73.533,56.896 62.103,56.896 54.749,49.542 54.749,44.081 ; R15.1 54.761,42.59 R17.1@54.761,41.16 ; R15.1 55.835,43.688 57.531,43.688 58.547,44.704 59.69,44.704 60.198,44.196 ; R15.1 54.749,44.081
  Bottom layer w0.254: v1(54.356,33.782) 58.801,33.782 v1(59.817,34.798) ; R22.1 74.422,66.179 74.422,64.389 72.898,62.865 C11.2 C12.2 75.754,62.676 v1(76.327,62.103)
Net2_3: 2.3 R15.2 U1.25 | length 11.7
  Top layer w0.254: 2.3 57.689,40.767 57.277,41.179 57.277,41.574 R15.2 58.223,42.602 v1(59.182,43.561)
  Bottom layer w0.254: v1(59.182,43.561) 59.182,40.894 60.513,39.563 U1.25
Net2_4: 2.4 R17.2 U1.24 | length 20.5
  Top layer w0.254: v1(54.483,39.37) R17.2 56.769,41.148 57.658,40.259 2.4
  Bottom layer w0.254: v1(54.483,39.37) 55.372,40.259 57.023,40.259 58.039,41.275 58.039,43.942 58.801,44.704 59.944,44.704 60.198,44.45 60.198,41.275 61.013,40.46 U1.24
Net2_6: 2.6 R13.1 | length 1.8
  Top layer w0.254: 2.6@61.214,39.726 61.246,39.694 R13.1
Net2_8: 2.8 R19.2 U1.11 | length 7.2
  Top layer w0.254: 2.8 62.103,40.767 62.484,41.148 R19.2 63.004,42.557 v1(63.373,42.926)
  Bottom layer w0.254: v1(63.373,42.926) 65.228,42.926 65.756,43.454 U1.11
Net2_10: 2.10 MOSFET1.5 MOSFET1.6 MOSFET1.7 MOSFET1.8 P3.1 | length 64.2
  Top layer w0.254: 2.10 v1(61.214,43.053) ; MOSFET1.7 MOSFET1.6 MOSFET1.5 60.833,45.085 v1(59.563,46.355) 58.928,45.72 55.372,45.72 55.245,45.847 55.245,49.499 59.086,53.34 64.77,53.34 65.532,54.102 65.532,55.245 66.378,56.091 73.363,56.091 74.846,57.574 76.655,57.574 77.978,58.897 77.978,61.976 72.898,67.056 72.898,67.564 72.39,68.072 69.977,68.072 69.755,67.85 P3.1@69.755,65.659 ; MOSFET1.8 61.767,47.733 MOSFET1.7@61.821,47.679
  Bottom layer w0.254: v1(59.563,46.355) 60.325,46.355 61.214,45.466 v1(61.214,43.053)
Net*2_1: *2.1 C6.2 Connector.1 Q1.3 U2.6 | length 39.5
  Top layer w0.254: U2.6 83.175,56.251 83.74,56.816 C6.2@83.74,57.404 ; *2.1 *2.1@85.558,64.81
  Top layer w0.5: C6.2@83.74,57.404 83.74,63.011 *2.1
  Bottom layer w0.5: Q1.3@64.389,65.296 63.887,64.794 63.887,62.221 67.942,58.166 78.895,58.166 *2.1
Netbq51013B_2: bq51013B.2 C13.2 C14.1 C15.2 C16.1 C20.2 C21.2 C22.2 C26.1 | length 30.1
  Top layer w0.254: C22.2 C13.2 C20.2 60.009,30.045 C14.1 60.768,33.401 C26.1 59.309,33.655 58.674,34.29 58.674,35.56 58.928,35.814 C16.1 61.784,36.703 63.583,36.703 64.135,36.151 ; bq51013B.2 64.135,36.151 ; C21.2 67.678,39.37 ; 64.135,36.151 64.135,37.071 65.545,38.481 66.535,38.481 67.424,39.37 ; 67.424,39.37 67.551,39.497 67.678,39.37 ; 67.424,39.37 67.678,39.37
Netbq51013B_3: bq51013B.3 C16.2 | length 3.5
  Top layer w0.254: C16.2@62.295,35.941 63.5,35.941 64.613,34.828 bq51013B.3@65.302,34.828
Netbq51013B_5: bq51013B.5 C26.2 | length 2.8
  Top layer w0.254: C26.2 62.913,33.655 63.036,33.778 bq51013B.5@65.152,33.778
Netbq51013B_6: bq51013B.6 C14.2 | length 4.2
  Top layer w0.254: C14.2 62.168,31.369 64.06,33.261 bq51013B.6
Netbq51013B_12: bq51013B.12 R18.1 | length 10.2
  Top layer w0.254: bq51013B.12@68.439,31.795 71.024,29.21 72.39,29.21 74.168,27.432 R18.1
Netbq51013B_13: bq51013B.13 R14.1 | length 4.6
  Top layer w0.254: bq51013B.13@68.452,32.278 68.814,32.278 70.993,30.099 R14.1
Netbq51013B_14: bq51013B.14 R16.1 R18.2 R20.2 | length 21.1
  Top layer w0.254: bq51013B.14 73.541,32.761 73.673,32.893 74.409,32.893 74.93,32.372 74.93,31.877 76.073,30.734 76.073,25.165 R18.2 74.053,23.375 R20.2 R16.1
Netbq51013B_15: bq51013B.15 C24.2 | length 8.5
  Top layer w0.254: bq51013B.15@68.452,33.278 73.475,33.278 C24.2
Netbq51013B_16: bq51013B.16 C25.2 | length 7
  Top layer w0.254: bq51013B.16@68.452,33.778 72.64,33.778 74.422,35.56 C25.2
Netbq51013B_17: bq51013B.17 C23.2 | length 5.2
  Top layer w0.254: bq51013B.17@68.452,34.278 71.173,34.278 C23.2
Netbq51013B_18: bq51013B.18 C17.2 C18.2 C19.2 R16.2 | length 33.2
  Top layer w0.254: C19.2 C18.2 C17.2 ; C17.2@68.294,26.132 69.101,26.132 ; bq51013B.18@68.439,34.795 68.442,34.798 69.85,34.798 v1(70.358,35.306) ; R16.2 69.101,26.132 ; v1@72.009,27.432 v1(71.755,27.686) 71.755,26.797 71.09,26.132 69.101,26.132
  Bottom layer w0.254: v1(70.358,35.306) 76.708,35.306 79.121,32.893 79.121,29.464 77.343,27.686 v1(71.755,27.686)
Netbq51013B_19: bq51013B.19 C22.1 D3.C P100.1 | length 68.8
  Top layer w0.254: P100.1 52.451,31.031 D3.C 52.451,28.194 52.511,28.134 ; C22.1 55.88,24.765 52.511,28.134 ; bq51013B.19@68.439,35.295 68.95,35.295 69.342,35.687 69.342,36.576 v1(69.088,36.83) ; v1(80.137,29.337) 80.137,25.527 76.073,21.463 56.611,21.463 52.511,25.563 52.511,28.134
  Bottom layer w0.254: v1(69.088,36.83) 76.2,36.83 80.264,32.766 80.264,29.464 v1(80.137,29.337)
NetC1_2: C1.2 R1.2 X1.4 | length 6.4
  Bottom layer w0.254: R1.2 73.354,48.387 X1.4@74.676,47.065 ; C1.2@74.676,49.704 X1.4@74.676,47.065 ; X1.4@74.727,47.014 X1.4@74.676,47.065
NetC2_2: C2.2 R2.2 X1.1 | length 9.7
  Bottom layer w0.254: R2.2 72.771,46.863 73.66,45.974 76.701,45.974 X1.1@77.831,47.104 ; C2.2@77.851,49.338 77.927,49.262 X1.1
NetC5_2: C5.2 Diode1.C MOSFET1.1 MOSFET1.2 MOSFET1.3 U2.2 U2.4 | length 35.3
  Top layer w0.254: U2.2 82.675,51.484 C5.2@83.232,50.927 ; C5.2 83.675,51.482 U2.4
  Top layer w0.5: MOSFET1.3 MOSFET1.2 MOSFET1.1 57.404,49.702 63.046,49.702 Diode1.C 80.295,47.99 C5.2@83.232,50.927
NetC9_2: C9.2 R6.2 U1.10 | length 96.7
  Bottom layer w0.254: R6.2 33.974,43.511 C9.2 33.974,36.607 50.515,20.066 67.468,20.066 68.484,21.082 75.438,21.082 83.439,29.083 83.439,40.386 80.01,43.815 67.419,43.815 67.28,43.954 U1.10
NetC10_2: C10.2 Connector.5 D1.1 Q2.1 | length 16.6
  Top layer w0.254: Q2.1 47.94,63.82 v1(49.149,62.611) 50.419,63.881 52.227,63.881 Connector.5@53.887,62.221
  Bottom layer w0.254: v1(49.149,62.611) 49.149,61.93 D1.1 52.024,57.512 C10.2
NetC13_1: C13.1 C15.1 C20.1 D2.C P100.2 | length 13.6
  Top layer w0.254: P100.2@50.927,35.047 51.173,35.047 53.086,33.134 53.086,32.888 54.588,31.386 D2.C 57.338,30.608 C20.1 C13.1 C15.1@58.609,26.416
NetC21_1: C21.1 C23.1 C24.1 C25.1 | length 5.1
  Top layer w0.254: C21.1 72.898,39.308 C23.1 C25.1@74.422,37.403 ; C25.1 75.819,37.276 C24.1
NetConnector_3: Connector.3 R11.1 U1.9 | length 44.5
  Bottom layer w0.254: Connector.3@59.008,62.726 61.409,60.325 R11.1@62.369,60.325 ; R11.1 63.766,60.313 67.183,56.896 68.326,56.896 69.977,55.245 75.311,55.245 79.756,50.8 79.756,45.847 78.363,44.454 U1.9
NetD4_1: D4.1 LCD.6 LCD.7 | length 7.1
  Bottom layer w0.254: D4.1 70.231,23.758 70.523,23.466 ; LCD.7@70.542,22.712 70.523,22.731 70.523,23.466 ; LCD.6@71.042,22.712 71.042,22.947 70.523,23.466
NetInd_1: Ind.1 U2.1 | length 4.9
  Top layer w1: Ind.1@78.613,52.959 80.264,51.308 80.772,51.308 80.899,51.435 81.788,51.435 81.788,51.816 ; 81.788,52.05 81.788,52.691
NetInd_2: Ind.2 U2.7 | length 8.7
  Top layer w0.254: U2.7 82.675,56.898
  Top layer w1: Ind.2@76.073,55.626 76.835,55.626 78.486,57.277 82.296,57.277 82.675,56.898
NetLCD_17: LCD.17 R23.2 | length 7.8
  Bottom layer w0.254: R23.2@64.135,29.579 64.528,29.579 65.542,28.565 LCD.17
NetLCD_36: LCD.36 R10.2 | length 9.5
  Bottom layer w0.254: R10.2 50.038,22.51 51.212,21.336 55.88,21.336 56.042,21.498 LCD.36
NetP1_1: P1.1 U1.14 | length 16
  Bottom layer w0.254: U1.14 67.442,41.954 68.834,40.562 68.834,40.272 69.355,39.751 81.28,39.751 P1.1
NetP1_2: P1.2 U1.15 | length 16.9
  Bottom layer w0.254: U1.15 67.403,41.454 68.453,40.404 68.453,40.114 69.197,39.37 79.121,39.37 P1.2
NetP2_1: P2.1 R3.1 | length 3.4
  Top layer w0.254: P2.1@41.148,62.357 42.533,63.742 R3.1
NetP2_2: P2.2 R4.1 | length 3.1
  Top layer w0.254: P2.2@41.148,59.817 41.771,60.44 R4.1
NetP2_3: P2.3 R5.1 | length 9.4
  Top layer w0.254: P2.3@41.148,57.277 47.752,50.673 R5.1
NetQ1_2: Q1.2 R21.2 | length 2.8
  Bottom layer w0.254: Q1.2@65.339,67.546 66.07,67.546 R21.2
NetQ2_2: Q2.2 R12.2 | length 8
  Top layer w0.254: Q2.2 46.04,59.116 47.244,57.912 R12.2
NetQ3_1: Q3.1 R21.1 | length 2.3
  Bottom layer w0.254: R21.1 69.668,67.552 Q3.1
NetQ3_2: Q3.2 R22.2 | length 2.7
  Bottom layer w0.254: Q3.2 74.162,67.673 R22.2
NetR1_1: R1.1 U1.3 | length 3.9
  Bottom layer w0.254: U1.3 68.282,47.454 69.215,48.387 R1.1
NetR2_1: R2.1 U1.4 | length 3.4
  Bottom layer w0.254: U1.4@66.509,46.954 U1.4 69.771,46.954 R2.1
NetR8_2: R8.2 R9.2 U1.60 | length 5.2
  Bottom layer w0.254: R9.2 61.214,51.816 62.259,51.816 62.513,51.562 ; R8.2 62.513,52.053 62.513,51.562 ; U1.60 62.513,51.562
NetR12_1: R12.1 U1.50 | length 12.5
  Top layer w0.254: R12.1 48.26,55.88 52.578,51.562 v1(55.118,51.562)
  Bottom layer w0.254: v1(55.118,51.562) 57.277,51.562 57.513,51.326 U1.50
PAD: bq51013B.21 | length 4
  Top layer w0.254: bq51013B.21@66.4,31.324 66.4,33.236 66.675,33.511 66.675,34.036 66.675,34.786 bq51013B.21@66.675,35.236
R/W: LCD.11 U1.42 | length 70.1
  Bottom layer w0.254: U1.42 53.709,45.454 52.451,44.196 49.276,44.196 48.26,45.212 36.703,45.212 35.433,43.942 35.433,35.687 50.673,20.447 67.31,20.447 68.542,21.679 LCD.11
"RESET LCD": LCD.15 U1.41 | length 46.2
  Top layer w0.254: v1(49.022,35.814) v1(49.022,42.545)
  Bottom layer w0.254: v1(49.022,35.814) 49.022,22.987 51.054,20.955 65.913,20.955 66.542,21.584 LCD.15 ; v1(49.022,42.545) 51.609,42.545 54.018,44.954 U1.41
"SCK LCD": LCD.10 U1.21 | length 22.5
  Bottom layer w0.254: U1.21 62.607,38.86 62.607,38.254 61.595,37.242 61.595,32.354 62.834,31.115 67.279,31.115 69.015,29.379 69.015,22.612 LCD.10
T_JTCK: R3.2 U1.49 | length 20.6
  Top layer w0.254: R3.2 43.942,61.748 44.678,61.748 45.212,61.214 45.212,57.912 50.927,52.197 50.927,51.689 v1(51.816,50.8)
  Bottom layer w0.254: v1(51.816,50.8) 51.943,50.673 55.486,50.673 55.613,50.8 56.667,50.8 U1.49
T_JTMS: R4.2 U1.46 | length 20.3
  Top layer w0.254: R4.2 43.942,57.417 51.435,49.924 v1(51.435,45.974)
  Bottom layer w0.254: v1(51.435,45.974) 52.604,45.974 53.991,47.36 54.92,47.36 U1.46
T_NRST: C36.2 R5.2 R7.1 U1.7 | length 24.9
  Top layer w0.254: C36.2 46.171,50.349 47.359,49.161 R5.2 48.248,49.161 v1@49.403,48.006 ; R7.1 49.403,49.034 v1@49.403,48.006 ; v1(49.403,47.752) v1@49.403,48.006
  Bottom layer w0.254: v1(49.403,47.752) 53.203,47.752 54.311,48.86 55.715,48.86 56.987,47.589 62.901,47.589 65.036,45.454 U1.7
VCC: 1.1 *2.2 C3.2 C4.2 C7.2 C8.2 C10.1 C27.2 C28.2 C29.1 C30.2 C31.2 C32.2 C33.2 C34.2 C35.2 Connector.2 Connector.4 Connector.6 D1.2 D4.2 LCD.35 P2.4 Q1.1 R7.2 R8.1 Radio.1 U1.1 U1.13 U1.19 U1.32 U1.64 | length 82.8
  Top layer w0.254: v1(38.735,54.991) P2.4 ; Radio.1@45.707,45.326 45.707,47.612 46.039,47.944 46.039,48.641 v1(47.371,47.309) ; v1(45.835,54.102) R7.2 ; Connector.4@56.508,61.715 Connector.4@56.508,62.726 ; v1(71.802,31.543) v1@71.849,31.496 ; *2.2@85.412,67.183 *2.2
  Bottom layer w0.2: LCD.35@56.542,22.712 C32.2@56.542,27.833
  Bottom layer w0.254: C27.2 C27.2@35.752,52.847 ; v1(35.814,54.356) 35.752,54.294 C27.2@35.752,52.847 ; 1.1@35.941,50.479 1.1 35.814,52.785 C27.2@35.752,52.847 ; C30.2 51.116,65.293 v1(51.228,65.405) ; C30.2@51.228,64.008 51.228,62.38 Connector.6@51.387,62.221 ; v2(51.308,38.735) 52.767,38.735 C8.2 53.275,38.8 53.721,38.354 56.413,38.354 U1.32 ; v2(53.975,28.321) 56.054,28.321 C32.2@56.542,27.833 ; C10.1@54.943,56.021 56.326,57.404 v1(56.388,57.404) ; Connector.4@56.387,62.221 v1(56.388,63.754) ; LCD.35 LCD.35@56.542,22.712 ; v1(56.769,59.436) 57.15,59.055 D1.2 D1.2@58.974,57.751 ; v1(59.932,56.134) R8.1 ; U1.19 63.5,38.941 C28.2 65.089,36.768 v1(65.278,36.957) ; U1.64 64.513,50.924 65.659,52.07 65.659,53.275 C7.2 66.802,52.894 v1(66.802,52.418) ; U1.13 67.6,42.454 67.818,42.672 C4.2 68.515,42.224 v1(69.848,40.892) ; U1.1 66.55,48.454 C3.2 68.134,50.862 68.834,51.562 v1(68.834,51.816) 69.088,51.816 v1@69.008,51.736 ; D4.2 70.714,30.933 71.802,29.845 v1(71.802,31.543) ; C31.2@71.56,29.833 C31.2@71.675,29.718
  Bottom layer w0.5: v1(59.817,64.135) 59.516,64.135 61.167,65.786 61.387,65.566 Connector.2@61.387,62.221 ; v1(62.738,68.58) 62.357,68.58 62.071,68.294 61.294,68.294 62.042,67.546 Q1.1 ; v1(80.979,67.263) 85.492,67.263 *2.2
"WirComm CE": Radio.3 U1.40 | length 17.5
  Top layer w0.254: v1(42.926,41.783) 42.926,45.065 Radio.3@43.187,45.326
  Bottom layer w0.254: v1(42.926,41.783) 44.502,41.783 45.264,41.021 50.624,41.021 54.057,44.454 U1.40
"WirComm CSN": Radio.4 U1.39 | length 19.2
  Top layer w0.254: v1(41.783,43.688) 41.907,43.812 Radio.4@41.907,45.316
  Bottom layer w0.254: v1(41.783,43.688) 41.783,40.894 42.037,40.64 44.048,40.64 44.051,40.643 45.103,40.643 45.106,40.64 50.782,40.64 54.061,43.919 54.978,43.919 U1.39
"WirComm IRQ": Radio.8 U1.38 | length 26
  Top layer w0.254: v1(36.703,40.259) 36.767,40.323 36.767,45.316 Radio.8@36.767,46.205
  Bottom layer w0.254: v1(36.703,40.259) 44.206,40.259 44.209,40.262 44.945,40.262 44.948,40.259 51.562,40.259 51.943,40.64 51.943,41.262 54.135,43.454 U1.38
"WirComm MOSI": Radio.6 U1.53 | length 27
  Top layer w0.254: Radio.6@39.367,46.205 v1(39.367,50.416)
  Bottom layer w0.254: v1(39.367,50.416) 43.527,50.416 45.943,52.832 53.545,52.832 53.926,53.213 57.689,53.213 59.013,51.888 U1.53
"WirComm SCK": Radio.5 U1.51 | length 23.3
  Top layer w0.254: Radio.5@40.637,45.316 40.637,47.622 v1(40.894,47.879)
  Bottom layer w0.254: v1(40.894,47.879) 42.545,49.53 43.962,49.53 46.375,51.943 53.734,51.943 54.242,52.451 57.373,52.451 58.013,51.811 U1.51
pads on no net: 2.2 2.7 2.9 2.11 *2.25 bq51013B.8 Connector.hole1 Connector.hole2 LCD.1 LCD.2 LCD.3 LCD.4 LCD.8 LCD.SMD1 LCD.SMD2 P3.P1 P3.P2 Radio.7 Radio.9 REF1.0 REF2.0 U1.2 U1.5 U1.6 U1.8 U1.16 U1.17 U1.22 U1.26 U1.27 U1.28 U1.29 U1.30 U1.33 U1.34 U1.35 U1.36 U1.37 U1.43 U1.44 U1.45 U1.48 U1.52 U1.54 U1.55 U1.56 U1.57 U1.58 U1.59 U1.61 U1.62 U2.5 X1.2 X1.3
copper on no net: | length 2.2
  Bottom layer w0.254: 51.943,29.706 52.693,29.706 53.594,30.607 v1(53.721,30.607)

## Polygon pours and split planes (outlines as drawn)
no net on Bottom layer "Bottom layer-No Net" (solid, shelved, pour order 4): 98.171,41.402
no net on Top layer "Top layer-No Net 1" (solid, pour order 20): 84.328,53.594
no net on Top layer "Top layer-No Net 2" (solid, pour order 12): 84.582,56.007
GND on Ground Plane (split plane): 86.088,69.199 86.066,69.178 86.067,69.176 86.069,69.175 86.09,69.197 87.755,67.532 87.755,21.495 86.328,20.068 33.179,20.068 31.498,21.749 31.498,67.659 33.179,69.34 85.947,69.34
VCC on Power Plane (split plane): 86.088,69.199 86.066,69.178 86.067,69.176 86.069,69.175 86.09,69.197 87.755,67.532 87.755,21.495 86.328,20.068 33.179,20.068 31.498,21.749 31.498,67.659 33.179,69.34 85.947,69.34

## Keep-outs
Top layer:
  lines w0.254: 31.115,65.151 31.115,67.818 32.766,69.469 33.02,69.723 46.545,69.723 72.834,69.723 86.106,69.723 86.36,69.469 88.138,67.691 ; 31.115,67.691 31.115,21.59 33.02,19.685 86.487,19.685 88.138,21.336 88.138,67.691 ; 88.138,67.564 88.138,67.691

## Other copper
Top layer:
  text "String" at 61.595,72.644 h1
  text "String" at 13.716,57.658 h1
Bottom layer:
  text "Wirelessin med WPIC1" at 104.013,77.47 h1